# Altium PCB Clock Car.PcbDoc (part 1 of 2)
Units mil, origin at the board's own origin, x right, y up, seen from the top; angles counter-clockwise.
Board outline 1450 x 3300 mil, 4 copper layers (TOP, GND, PWR, BOT), stack 60.556 mil thick; 84 components, 67 nets, 314 pads, 152 vias.
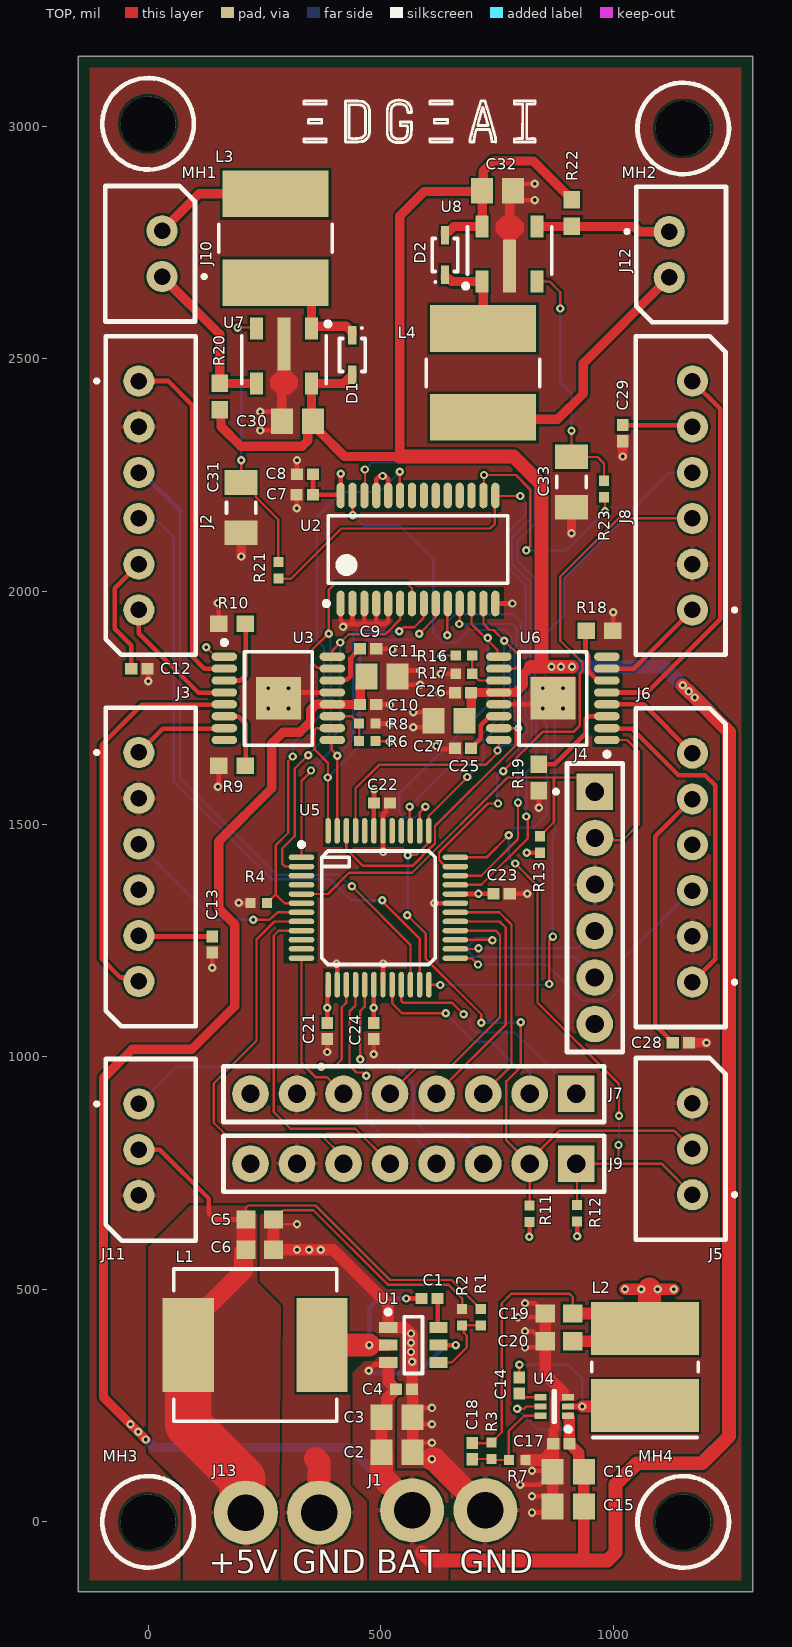
[diagram p0: TOP view]
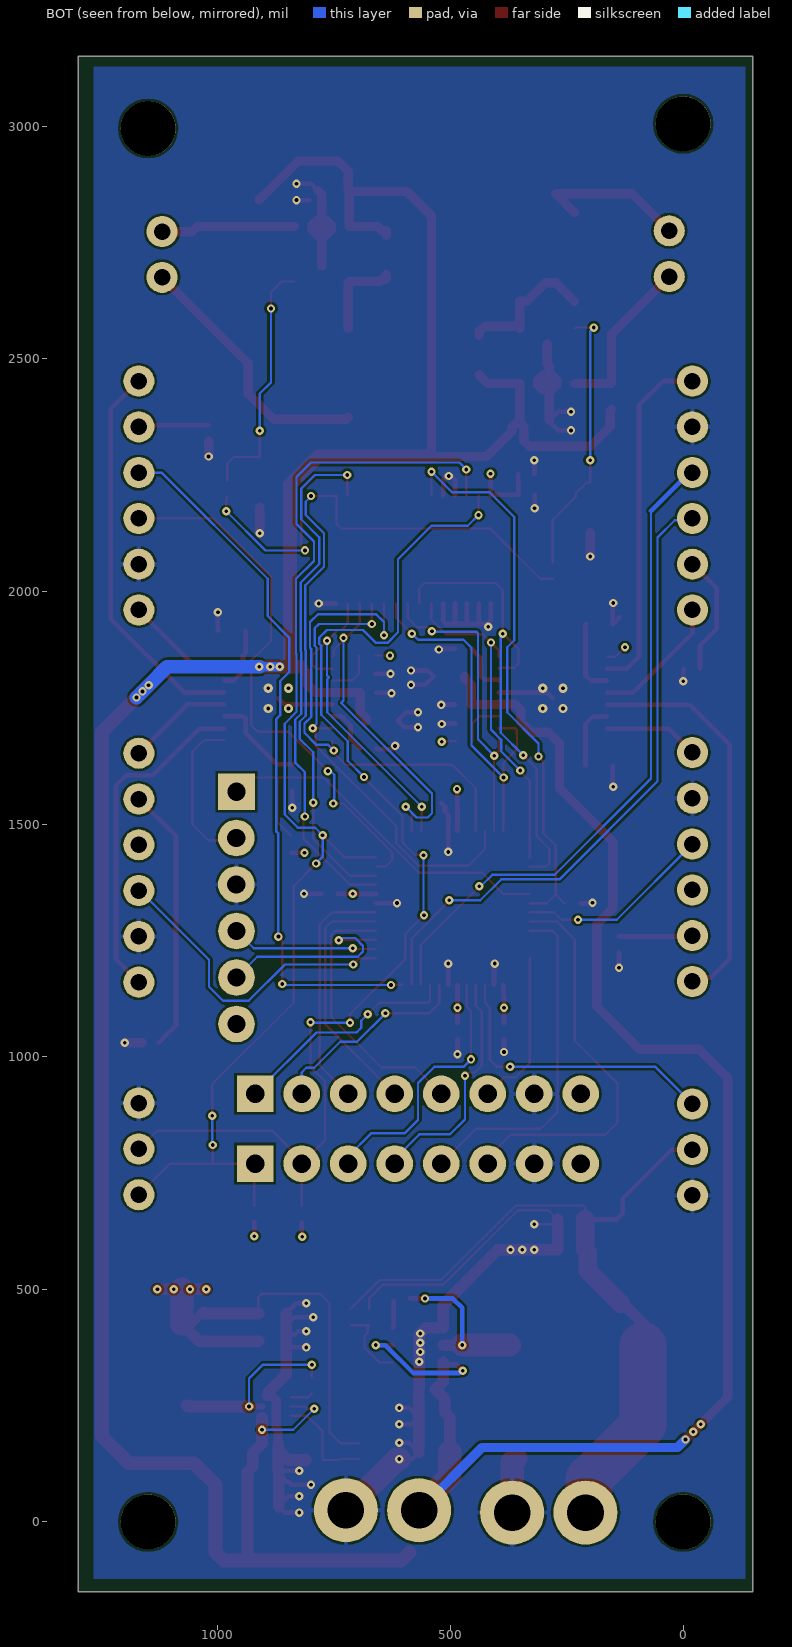
[diagram p1: BOT view, seen from below]
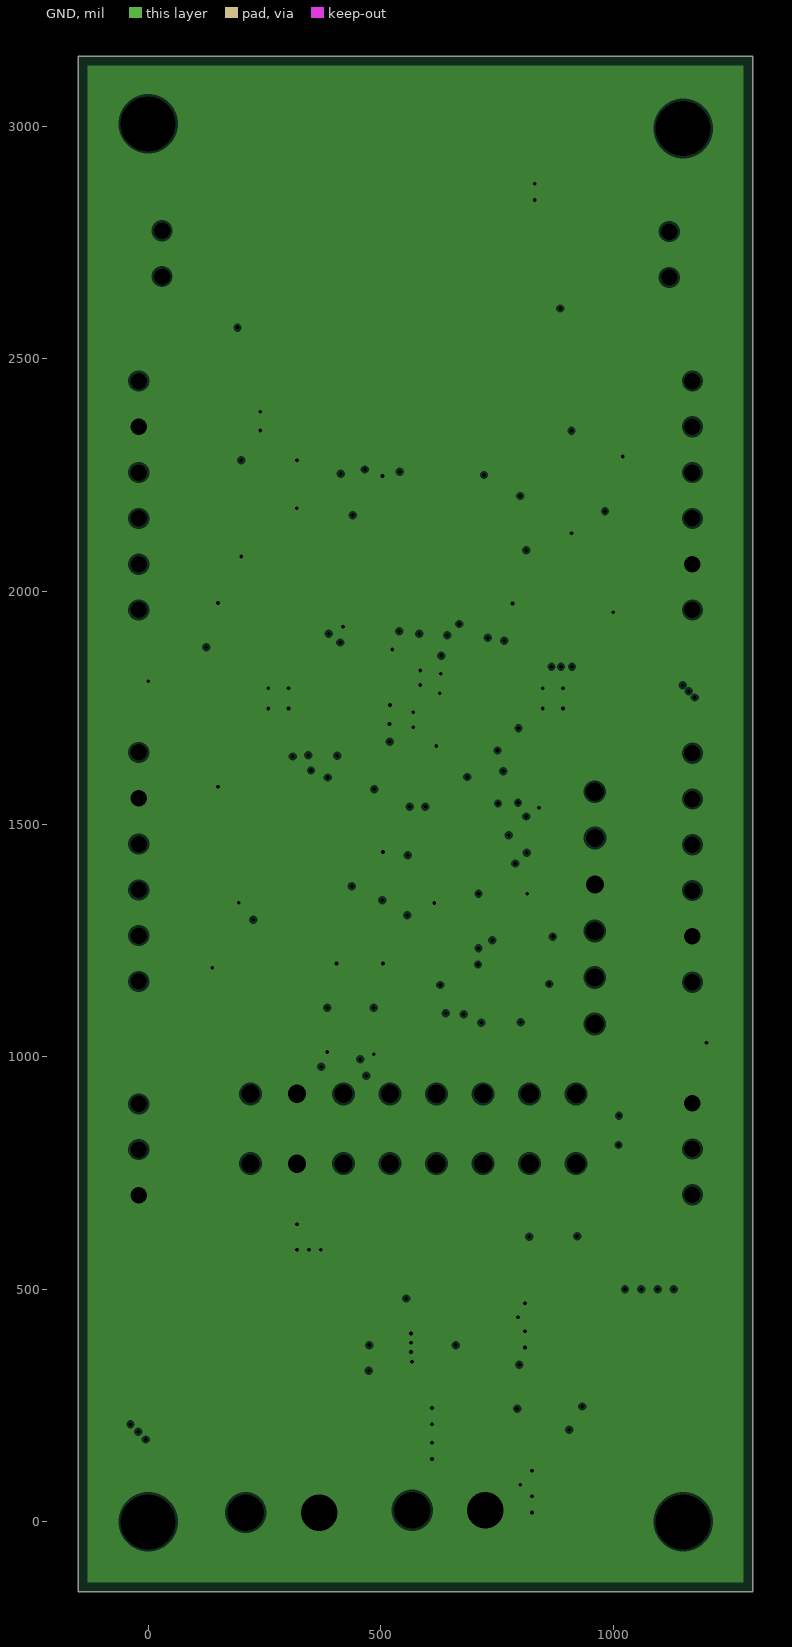
[diagram p2: GND, clearances drawn from the general rule]
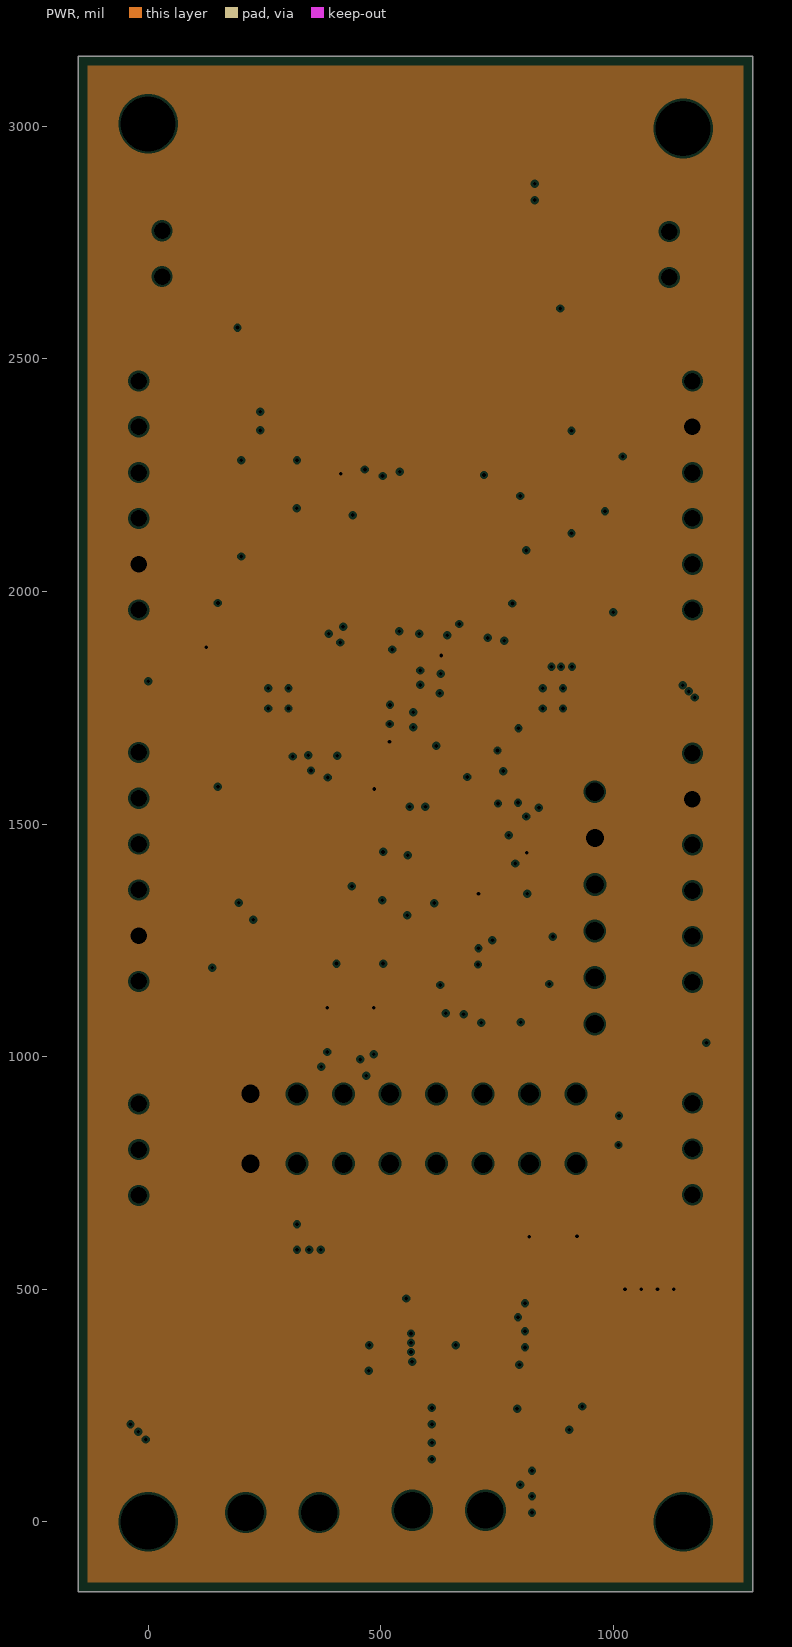
[diagram p3: PWR, clearances drawn from the general rule]

## Layer stack, top to bottom
Top Solder: solder mask 1, SM-001, Dk 4
TOP: signal copper 1.378
Dielectric 2: prepreg 7.5, PP-017, Dk 4.3
GND: plane copper 1.4, net GND
Dielectric 3: core 40, Core-039, Dk 4.8
PWR: plane copper 1.4, net +3V3
Dielectric 4: prepreg 7.5, PP-017, Dk 4.3
BOT: signal copper 1.378
Bottom Solder: solder mask 1, SM-001, Dk 4

## Board outline
-150,-150 1300,-150 1300,3150 -150,3150

## Design rules (kind name [scope] priority, off if disabled: settings)
Clearance [All] p1: gap=5 ignorepadtopadclearanceinfootprint=FALSE
HoleSize [All] p1: absolutevalues=TRUE maxlimit=200 minlimit=1 maxpercent=80.000 minpercent=20.000
MinimumSolderMaskSliver [All] p1: minsoldermaskwidth=5
PlaneClearance [All] p1: clearance=5
PlaneConnect PlaneConnect_1 [All] p1: pad.planeconnectstyle=Relief pad.reliefexpansion=20 pad.reliefentries=4 pad.reliefconductorwidth=10 pad.reliefairgap=10 via.planeconnectstyle=Direct via.reliefexpansion=20 via.reliefentries=4 via.reliefconductorwidth=10 via.reliefairgap=10
PlaneConnect [All] p2: planeconnectstyle=Direct reliefexpansion=20 reliefentries=4 reliefconductorwidth=10 reliefairgap=10
PolygonConnect PolygonConnect_1 [All] p1: thpad.connectstyle=Relief thpad.reliefconductorwidth=10 thpad.reliefentries=4 thpad.polygonreliefangle="90 Angle" thpad.airgapwidth=5 smdpad.connectstyle=Direct smdpad.reliefconductorwidth=10 smdpad.reliefentries=4 smdpad.polygonreliefangle="90 Angle" smdpad.airgapwidth=10 via.connectstyle=Direct via.reliefconductorwidth=10 via.reliefentries=4 via.polygonreliefangle="90 Angle" via.airgapwidth=10
PolygonConnect [All] p2: connectstyle=Direct reliefconductorwidth=10 reliefentries=4 polygonreliefangle="90 Angle" airgapwidth=10
RoutingVias [All] p1: holewidth=8 width=18 viastyle="Through Hole" minholewidth=8 minwidth=18 maxholewidth=8 maxwidth=18
SilkToSilkClearance [All] p1: silktosilkclearance=0
SilkToSolderMaskClearance [IsPad] p1: minsilkscreentomaskgap=5 clearancetoexposedcopper=TRUE
SolderMaskExpansion [All] p1: expansion=4 istentingtop=FALSE
Width [All] p1: maxlimit=100 minlimit=5 preferedwidth=10 minimp=50.000000 maximp=50.000000 favimp=50.000000
24 further rules are at their usual default settings.

## Components (designator, comment, footprint, x,y, rotation, side; value= is the part's Value field where it differs from the comment)
C1 "100nF" C0402 605,480 r180 top
C2 "10uF" C0805 535,150 r180 top
C3 "10uF" C0805 535,225 r180 top
C4 "100nF" C0402 550,285 r180 top
C5 "22uF" C0603 240,650 r180 top
C6 "22uF" C0603 240,585 r180 top
C7 "100nF" C0402 336.68,2208 r0 top
C8 "100nF" C0402 337,2252 r0 top
C9 "2u2" C0402 473,1877 r180 top
C10 "100nF" C0402 473,1757 r180 top
C11 "10uF" C0805 503,1817 r180 top
C12 "100nF" C0402 -19,1834 r180 top
C13 "100nF" C0402 138,1241 r90 top
C14 "100nF" C0402 798,293 r90 top
C15 "10uF" C0805 903,33 r0 top
C16 "10uF" C0805 903,108 r0 top
C17 "100nF" C0402 888,168 r0 top
C18 "20pF" C0402 697,152 r90 top
C19 "22uF" C0603 883,448 r0 top
C20 "22uF" C0603 883,388 r0 top
C21 "100nF" C0402 385,1055 r90 top
C22 "100nF" C0402 502.68,1545 r180 top
C23 "100nF" C0402 760,1350 r180 top
C24 "100nF" C0402 485,1055 r90 top
C25 "2u2" C0402 677,1663 r0 top
C26 "100nF" C0402 677,1782 r0 top
C27 "10uF" C0805 647,1722 r0 top
C28 "100nF" C0402 1145,1030 r180 top
C29 "100nF" C0402 1020,2340 r90 top
C30 "10uF" C0805 321,2366 r0 top
C31 "100uF" C1206 200,2180 r90 top
C32 "10uF" C0805 751,2861 r180 top
C33 "100uF" C1206 910,2235 r90 top
D1 "NSVR0320MW2T1G" SODFL250X100-2N 439,2508 r270 top
D2 "NSVR0320MW2T1G" SODFL250X100-2N 638,2723 r90 top
J1 "PWR" PWR 567.52,25 r0 top
J2 "0022035065" 0022035065 -20,2452.13 r90 top
J3 "0022035065" 0022035065 -20,1653.7 r90 top
J4 "PICKIT" PICKIT 960.39,1570 r0 top
J5 "0099990987" 0099990987 1170,703.15 r270 top
J6 "0022035065" 0022035065 1170,1160 r270 top
J7 "SIP8" SIP8 920,920 r270 top
J8 "0022035065" 0022035065 1170,1960 r270 top
J9 "SIP8" SIP8 920,770 r270 top
J10 "0099990986" 0099990986 30,2676.57 r270 top
J11 "0099990987" 0099990987 -20,898.43 r90 top
J12 "0099990986" 0099990986 1120,2773.43 r90 top
J13 "PWR" PWR 210,20 r0 top
L1 "3u3" INDP8682X40N 230,380 r180 top
L2 "3u3" INDP5858X39N 1068,333 r90 top
L3 "100u" INDP6060X28N 274,2759 r90 top
L4 "100u" INDP6060X28N 720,2469.53 r270 top
MH1 "MH3MM_5MM" MH3MM_5MM 0,3005 r0 top
MH2 "MH3MM_5MM" MH3MM_5MM 1150,2995 r0 top
MH3 "MH3MM_5MM" MH3MM_5MM 0,0 r0 top
MH4 "MH3MM_5MM" MH3MM_5MM 1150,0 r0 top
R1 "54k9" RESC1005X04N 715,440 r90 top
R2 "10k" RESC1005X04N 675,440 r270 top
R3 "30.9k" RESC1005X04N 738,153 r90 top
R4 "10k" RESC1005X04N 238,1330 r0 top
R6 "10k" RESC1005X04N 471,1678 r0 top
R7 "10k" RESC1005X04N 793,133 r180 top
R8 "5.6k" RESC1005X04N 471,1716 r180 top
R9 "0R3" RESC1608X06N 180,1625 r0 top
R10 "0R3" RESC1608X06N 180,1930 r0 top
R11 "10k" RESC1005X04N 820,662 r270 top
R12 "10k" RESC1005X04N 922,663 r270 top
R13 "10k" RESC1005X04N 842,1456 r270 top
R16 "10k" RESC1005X04N 679,1862 r180 top
R17 "5.6k" RESC1005X04N 679,1823 r0 top
R18 "0R3" RESC1608X06N 970,1915 r180 top
R19 "0R3" RESC1608X06N 840,1600 r90 top
R20 "0R3" RESC1608X06N 154,2419 r270 top
R21 "10M" RESC1005X04N 280,2045 r90 top
R22 "0R3" RESC1608X06N 911,2813 r90 top
R23 "10M" RESC1005X04N 980,2220 r90 top
U1 "TPS565208DDCR" SOT95P280X110-6N 570,380 r0 top
U2 "PCA9685PW/Q900,118" TSOP65P640X110-28N 580,2090 r90 top
U3 "DRV8848PWPR" TSOP65P640X120_HS-17N 280,1770 r0 top
U4 "TPS562202DRLR" SOTFL50P160X60-6N 873,248 r180 top
U5 "DSPIC33CK256MP505T-I/PT" CQFP50P900X900X120-48N 495,1320 r0 top
U6 "DRV8848PWPR" TSOP65P640X120_HS-17N 870,1770 r180 top
U7 "AL8861Y-13" SOT89-150P330X160-5N 292,2506 r270 top
U8 "AL8861Y-13" SOT89-150P330X160-5N 777,2725 r90 top

## Footprints (in the part's own frame and the unit in brackets; to place one, negate y for a bottom-side part, rotate by r counter-clockwise, add the part's x,y. Pads: shape width x height; smd on the part's side, far side on the other; paste and mask are expansions set on the pad)
0022035065 [mm]
  round 1.7 hole 0.9: 1(0,0) 2(-2.5,0) 3(-5,0) 4(-7.5,0) 5(-10,0) 6(-12.5,0)
  silkscreen extent -14.95,-3.1 2.45,2.37, body extent -15,-3.07 2.4,1.83, height 5.95
0099990986 [mm]
  round 1.7 hole 0.9: 1(0,0) 2(-2.5,0)
  silkscreen extent -4.95,-3.1 2.45,2.37, body extent -5,-3.07 2.4,1.83, height 5.95
0099990987 [mm]
  round 1.7 hole 0.9: 1(0,0) 2(-2.5,0) 3(-5,0)
  silkscreen extent -7.46,-3.1 2.45,2.37, body extent -7.45,-3.07 2.45,1.83, height 5.95
C0402 [mm] "Chip Capacitor, 2-Leads, Body 1.00x0.50mm, IPC Medium Density"
  rect 0.66x0.62 smd mask+0.071: 1(-0.44,0) 2(0.44,0)
  body extent -0.53,-0.28 0.53,0.27, height 0.55
C0603 [mm] "Chip Capacitor, 2-Leads, Body 1.60x0.80mm, IPC Medium Density"
  rect 1.05x1 smd: 1(-0.75,0) 2(0.75,0)
  body extent -0.88,-0.48 0.87,0.47, height 0.9
C0805 [mm] "Chip Capacitor, 2-Leads, Body 2.00x1.25mm, IPC Medium Density"
  rect 1.2x1.4 smd: 1(-0.85,0) 2(0.85,0)
  body extent -1.05,-0.67 1.05,0.67, height 1.35
C1206 [mm] "Chip Capacitor, 2-Leads, Body 3.20x1.60mm, IPC Medium Density"
  rect 1.35x1.8 smd: 1(-1.375,0) 2(1.375,0)
  silkscreen extent -0.3,-0.8 0.3,0.8, body extent -1.7,-0.9 1.7,0.9, height 1.8
CQFP50P900X900X120-48N [mm] "CQFP, 48-Leads, Body 9.00x9.00mm, Pitch 0.50mm, IPC Medium Density"
  oval 1.4x0.3 smd: 1(-4.2,2.75) 2(-4.2,2.25) 3(-4.2,1.75) 4(-4.2,1.25) 5(-4.2,0.75) 6(-4.2,0.25) 7(-4.2,-0.25) 8(-4.2,-0.75) 9(-4.2,-1.25) 10(-4.2,-1.75) 11(-4.2,-2.25) 12(-4.2,-2.75) 25(4.2,-2.75) 26(4.2,-2.25) 27(4.2,-1.75) 28(4.2,-1.25) 29(4.2,-0.75) 30(4.2,-0.25) 31(4.2,0.25) 32(4.2,0.75) 33(4.2,1.25) 34(4.2,1.75) 35(4.2,2.25) 36(4.2,2.75)
  oval 0.3x1.4 smd: 13(-2.75,-4.2) 14(-2.25,-4.2) 15(-1.75,-4.2) 16(-1.25,-4.2) 17(-0.75,-4.2) 18(-0.25,-4.2) 19(0.25,-4.2) 20(0.75,-4.2) 21(1.25,-4.2) 22(1.75,-4.2) 23(2.25,-4.2) 24(2.75,-4.2) 37(2.75,4.2) 38(2.25,4.2) 39(1.75,4.2) 40(1.25,4.2) 41(0.75,4.2) 42(0.25,4.2) 43(-0.25,4.2) 44(-0.75,4.2) 45(-1.25,4.2) 46(-1.75,4.2) 47(-2.25,4.2) 48(-2.75,4.2)
  silkscreen extent -4.32,-3.1 3.1,3.57, body extent -4.5,-4.5 4.5,4.5, height 1.05
INDP5858X39N [mm] "Precision Wire Wound Inductor, 2-Leads, Body 5.80x5.80mm, IPC Medium Density"
  rect 2.9x5.9 smd: 1(-2.1,0) 2(2.1,0)
  silkscreen extent -3.85,-2.9 0.25,2.9, body extent -3,-2.9 3,2.9, height 4
INDP6060X28N [mm] "Precision Wire Wound Inductor, 2-Leads, Body 6.00x6.00mm, IPC Medium Density"
  rect 2.55x5.8 smd: 1(-2.425,0) 2(2.425,0)
  silkscreen extent -0.75,-3.1 0.75,3.1, body extent -3.1,-3 3.1,3, height 2.9
INDP8682X40N [mm] "Precision Wire Wound Inductor, 2-Leads, Body 8.64x8.18mm, IPC Medium Density"
  rect 2.8x5.15 smd: 1(-3.65,0) 2(3.65,0)
  silkscreen extent -4.45,-4.15 4.45,4.15, body extent -4.42,-4.09 4.42,4.09, height 4.1
MH3MM_5MM [mm]
  round 3 hole 3 unplated: 1(0,0)
  silkscreen extent -2.5,-2.5 2.5,2.5
PICKIT [mm]
  rect 2x2 hole 1: 1(-0.01,-0.017)
  round 2 hole 1: 2(0,-2.54) 3(0,-5.08) 4(-0.01,-7.62) 5(-0.01,-10.16) 6(-0.01,-12.7)
  silkscreen extent -2.22,-14.22 1.52,1.52
PWR [mm]
  round 3.5 hole 2: 1(0,0) 2(4,0)
RESC1005X04N [mm] "Chip Resistor, 2-Leads, Body 1.00x0.50mm, IPC Medium Density"
  rect 0.55x0.55 smd: 1(-0.45,0) 2(0.45,0)
  body extent -0.53,-0.27 0.53,0.28, height 0.4
RESC1608X06N [mm] "Chip Resistor, 2-Leads, Body 1.60x0.80mm, IPC Medium Density"
  rect 0.95x0.9 smd: 1(-0.725,0) 2(0.725,0)
  body extent -0.85,-0.45 0.85,0.45, height 0.55
SIP8 [mm]
  rect 2x2 hole 1: 1(0,0)
  round 2 hole 1: 2(0,-2.54) 3(0,-5.08) 4(0,-7.62) 5(0,-10.16) 6(0,-12.7) 7(0,-15.24) 8(0,-17.78)
  silkscreen extent -1.51,-19.25 1.53,1.54
SODFL250X100-2N [mm] "SODFL, 2-Leads, Body 1.25x2.50mm, IPC Medium Density"
  rect 1x0.45 smd: 1(-1.075,0) 2(1.075,0)
  silkscreen extent -1.52,-0.7 0.9,0.7, body extent -1.25,-0.67 1.25,0.67, height 1
SOT89-150P330X160-5N [mm] "SOT89, 3-Leads, Body 4.50x2.50mm, Pitch 1.50mm, Lead Span 3.3mm, IPC Medium Density"
  rect 1.2x0.7 smd: 1(-1.5,1.5) 3(-1.5,-1.5) 4(1.5,-1.5) 5(1.5,1.5)
  rect 2.9x0.7 smd: 2(-0.65,0)
  TOP region: 0.8,0.35 1.212,0.762 1.688,0.762 2.1,0.35 2.1,-0.35 1.688,-0.762 1.212,-0.762 0.8,-0.35
  silkscreen extent -1.87,-2.3 1.5,2.53, body extent -1.95,-2.3 1.3,2.3, height 1.6
SOT95P280X110-6N [mm] "SOT23, 6-Leads, Body 2.90x2.80mm, Pitch 0.95mm, IPC Medium Density"
  rect 1x0.6 smd: 1(-1.375,0.95) 2(-1.375,0) 3(-1.375,-0.95) 4(1.375,-0.95) 5(1.375,0) 6(1.375,0.95)
  silkscreen extent -1.5,-1.55 0.5,1.92, body extent -1.53,-1.53 1.53,1.53, height 1.1
SOTFL50P160X60-6N [mm] "SOTFL, 6-Leads, Body 1.60x1.60mm, Pitch 0.50mm, IPC Medium Density"
  rect 0.65x0.35 smd: 1(-0.75,0.5) 2(-0.75,0) 3(-0.75,-0.5) 4(0.75,-0.5) 5(0.75,0) 6(0.75,0.5)
  silkscreen extent -0.88,-0.85 0.05,1.35, body extent -0.8,-0.85 0.8,0.85, height 0.6
TSOP65P640X110-28N [mm] "TSOP, 28-Leads, Body 9.70x4.40mm, Pitch 0.65mm, IPC Medium Density"
  oval 1.4x0.45 smd: 1(-2.95,4.225) 2(-2.95,3.575) 3(-2.95,2.925) 4(-2.95,2.275) 5(-2.95,1.625) 6(-2.95,0.975) 7(-2.95,0.325) 8(-2.95,-0.325) 9(-2.95,-0.975) 10(-2.95,-1.625) 11(-2.95,-2.275) 12(-2.95,-2.925) 13(-2.95,-3.575) 14(-2.95,-4.225) 15(2.95,-4.225) 16(2.95,-3.575) 17(2.95,-2.925) 18(2.95,-2.275) 19(2.95,-1.625) 20(2.95,-0.975) 21(2.95,-0.325) 22(2.95,0.325) 23(2.95,0.975) 24(2.95,1.625) 25(2.95,2.275) 26(2.95,2.925) 27(2.95,3.575) 28(2.95,4.225)
  silkscreen extent -3.07,-4.9 1.85,5.12, body extent -3.2,-4.9 3.2,4.9, height 1.1
TSOP65P640X120_HS-17N [mm] "TSOP, 16-Leads, Body 5.00x4.40mm, Pitch 0.65mm, Thermal Pad 2.31x2.46mm, IPC Medium Density"
  oval 1.4x0.45 smd: 1(-2.95,2.275) 2(-2.95,1.625) 3(-2.95,0.975) 4(-2.95,0.325) 5(-2.95,-0.325) 6(-2.95,-0.975) 7(-2.95,-1.625) 8(-2.95,-2.275) 9(2.95,-2.275) 10(2.95,-1.625) 11(2.95,-0.975) 12(2.95,-0.325) 13(2.95,0.325) 14(2.95,0.975) 15(2.95,1.625) 16(2.95,2.275)
  rect 2.46x2.31 smd: 17(0,0)
  silkscreen extent -3.07,-2.55 1.85,3.17, body extent -3.2,-2.55 3.2,2.55, height 1.2

## Part data
C1 C7 C8 C12 C13 C14 C21 C22 C23 C24 C28 C29: library part CL05A104KP5NNNC, "Cap Ceramic 0.1uF 10V X5R 10% SMD 0402 85C Paper T/R", Case Code (Imperial)=0402, Case Code (Metric)=1005, Dielectric=X5R, Manufacturer=Samsung, Max Operating Temperature=85°C, Min Operating Temperature=-55°C, Supplier Part Number 1=1276-1022-1-ND, Tolerance=10%, Voltage Rating=10V, Capacitance=100nF, Case/Package=0402, ComponentLink1Description=https://datasheet.ciiva.com/25709/cl05a104kp5nnnc-25709120.pdf, ComponentLink1URL=https://datasheet.ciiva.com/25709/cl05a104kp5nnnc-25709120.pdf, ComponentLink2Description=https://datasheet.ciiva.com/26838/getdatasheetpartid-358611-26838151.pdf, ComponentLink2URL=https://datasheet.ciiva.com/26838/getdatasheetpartid-358611-26838151.pdf, ComponentLink3Description=https://datasheet.ciiva.com/16437/cl05b104kq5nnnc-16437370.pdf, ComponentLink3URL=https://datasheet.ciiva.com/16437/cl05b104kq5nnnc-16437370.pdf, ComponentLink4Description=https://datasheet.ciiva.com/26309/mlcc-catalogdownload2013-eng-26309007.pdf, ComponentLink4URL=https://datasheet.ciiva.com/26309/mlcc-catalogdownload2013-eng-26309007.pdf, Contact Plating=Tin, Depth=0.5mm, Height=0.5mm, Length=1mm, Manufacturer Part Number=CL05A104KP5NNNC, Mount="Surface Mount", Packaging="Tape and Reel", Part Number=CL05A104KP5NNNC, Pricing 1="1=0.1, 10=0.011, 100=0.0047, 500=0.0033, 1000=0.0026, 2500=0.0024, 5000=0.0022 (USD)", Radiation Hardening=No, Stock 1=2170577, Supplier 1=Digi-Key, Thickness=0.022inch, Voltage Rating (DC)=10V, Width=0.02inch
C2 C3 C11 C15 C16 C27 C30 C32: library part CL21A106KAYNNNG, "Ceramic Capacitor, Multilayer, Ceramic, 25V, 10% +Tol, 10% -Tol, X5R, 15% TC, 10uF, Surface Mount, 0805", Dielectric Material=Ceramic, Manufacturer=Samsung, Supplier Part Number 1=1276-6454-6-ND, Capacitance=10uF, Manufacturer Part Number=CL21A106KAYNNNG, Mount="Surface Mount", Number of Pins=2, Part Number=CL21A106KAYNNNG, Supplier 1=Digi-Key
C4 C10 C17 C26: library part CL05A104KA5NNNC, "Ceramic Capacitor, Multilayer, Ceramic, 25V, 10% +Tol, 10% -Tol, X5R, 15% TC, 0.1uF, Surface Mount, 0402", Manufacturer=Samsung, Supplier Part Number 1=1276-1043-1-ND, Capacitance=100nF, ComponentLink1Description=https://datasheet.ciiva.com:443/pdfs/VipMasterIC/IC/SEMS/SEMS-S-A0008384515/SEMS-S-A0008872913-1.pdf?src-supplier=IHS+Markit, ComponentLink1URL=https://datasheet.ciiva.com:443/pdfs/VipMasterIC/IC/SEMS/SEMS-S-A0008384515/SEMS-S-A0008872913-1.pdf?src-supplier=IHS+Markit, ComponentLink2Description=https://datasheet.ciiva.com/25802/cl05a104ka5nnnc-25802704.pdf?src-supplier=Digi-Key, ComponentLink2URL=https://datasheet.ciiva.com/25802/cl05a104ka5nnnc-25802704.pdf?src-supplier=Digi-Key, ComponentLink3Description=https://datasheet.ciiva.com/16437/cl05a104ka5nnnc-16437369.pdf?src-supplier=Future+Electronics, ComponentLink3URL=https://datasheet.ciiva.com/16437/cl05a104ka5nnnc-16437369.pdf?src-supplier=Future+Electronics, ComponentLink4Description=https://datasheet.ciiva.com/26838/getdatasheetpartid-357412-26838142.pdf?src-supplier=Verical, ComponentLink4URL=https://datasheet.ciiva.com/26838/getdatasheetpartid-357412-26838142.pdf?src-supplier=Verical, ComponentLink5URL=https://datasheet.ciiva.com/26309/mlcc-catalogdownload2013-eng-26309014.pdf?src-supplier=Distrelec, Manufacturer Part Number=CL05A104KA5NNNC, Part Number=CL05A104KA5NNNC, Supplier 1=Digi-Key
C5 C6 C19 C20: library part CL10A226MPMNUBE, "Ceramic Capacitor, Multilayer, Ceramic, 10V, 20% +Tol, 20% -Tol, X5R, 15% TC, 22uF, Surface Mount, 0603", Manufacturer=Samsung, Supplier Part Number 1=1276-6751-2-ND, Capacitance=22uF, Manufacturer Part Number=CL10A226MPMNUBE, Mount="Surface Mount", Part Number=CL10A226MPMNUBE, Supplier 1=Digi-Key
C9 C25: library part JMK105BJ225KV-F, "Ceramic Capacitor, Multilayer, Ceramic, 6.3V, 10% +Tol, 10% -Tol, X5R, 15% TC, 2.2uF, Surface Mount, 0402", Dielectric Material=Ceramic, Manufacturer="Taiyo Yuden", Package Shape=Rectangular, Supplier Part Number 1=587-5867-1-ND, Capacitance=2u2, Manufacturer Part Number=JMK105BJ225KV-F, Mount="Surface Mount", Number of Pins=2, Part Number=JMK105BJ225KV-F, Supplier 1=Digi-Key
C18: library part CC0402JRNPO9BN200, "CAP CER 20PF 50V NPO 0402", Case Code (Imperial)=0402, Case Code (Metric)=1005, Dielectric=C0G, Manufacturer=Yageo, Max Operating Temperature=125°C, Min Operating Temperature=-55°C, Package Quantity=1, Supplier Part Number 1=311-1417-2-ND, Tolerance=5%, Voltage Rating=50V, Capacitance=20pF, Case/Package=0402, ComponentLink1Description=https://datasheet.ciiva.com/7656/1132289-7656614.pdf, ComponentLink1URL=https://datasheet.ciiva.com/7656/1132289-7656614.pdf, ComponentLink2Description=https://datasheet.ciiva.com/176/mlccorderingcode-176360.pdf, ComponentLink2URL=https://datasheet.ciiva.com/176/mlccorderingcode-176360.pdf, ComponentLink3Description=https://datasheet.ciiva.com/176/mlccorderingcode-176361.pdf, ComponentLink3URL=https://datasheet.ciiva.com/176/mlccorderingcode-176361.pdf, ComponentLink4Description=https://datasheet.ciiva.com/5427/upy-gp-np0-16v-to-50v-8-3714-5427769.pdf, ComponentLink4URL=https://datasheet.ciiva.com/5427/upy-gp-np0-16v-to-50v-8-3714-5427769.pdf, Depth=0.5mm, Length=1mm, Manufacturer Part Number=CC0402JRNPO9BN200, Mount="Surface Mount", Packaging="Tape and Reel", Part Number=CC0402JRNPO9BN200, Pricing 1="10000=0.0033 (USD)", Stock 1=0, Supplier 1=Digi-Key, Thickness=0.022inch, Voltage Rating (DC)=50V, Width=0.02inch
C31 C33: library part CL31A107MQHNNNE, "Cap Ceramic 100uF 6.3V X5R 20% SMD 1206 85C T/R", Case Code (Imperial)=1206, Case Code (Metric)=3216, Dielectric=X5R, Manufacturer=Samsung, Max Operating Temperature=85°C, Min Operating Temperature=-55°C, Package Quantity=2000, Supplier Part Number 1=1276-1782-1-ND, Tolerance=20%, Voltage Rating=6.3V, Voltage Rating (DC)=6V3, Capacitance=100uF, Case/Package=1206, ComponentLink1Description=https://datasheet.ciiva.com/20173/71-0886-20173093.pdf, ComponentLink1URL=https://datasheet.ciiva.com/20173/71-0886-20173093.pdf, ComponentLink2Description=https://datasheet.ciiva.com/25723/cl31a107mqhnnne-25723159.pdf, ComponentLink2URL=https://datasheet.ciiva.com/25723/cl31a107mqhnnne-25723159.pdf, ComponentLink3Description=https://datasheet.ciiva.com/16437/cl31a107mqhnnne-16437212.pdf, ComponentLink3URL=https://datasheet.ciiva.com/16437/cl31a107mqhnnne-16437212.pdf, ComponentLink4Description=https://datasheet.ciiva.com/15195/getdatasheetpartid-358449-15195997.pdf, ComponentLink4URL=https://datasheet.ciiva.com/15195/getdatasheetpartid-358449-15195997.pdf, Contact Plating=Tin, Depth=1.6mm, Height=1.6mm, Length=3.2mm, Manufacturer Part Number=CL31A107MQHNNNE, Mount="Surface Mount", Packaging="Tape and Reel", Part Number=CL31A107MQHNNNE, Pricing 1="1=0.56, 10=0.396, 100=0.261, 500=0.1933, 1000=0.1643 (USD)", Radiation Hardening=No, Stock 1=3572, Supplier 1=Digi-Key, Thickness=0.071inch, Width=0.063inch
D1 D2: "Diode Schottky 20V 1A Automotive 2-Pin SOD-323 T/R", Forward Voltage=500mV, Manufacturer="ON Semiconductor", Supplier Part Number 1=NSVR0320MW2T1GOSCT-ND, Height=0.9mm, Lead Free="Lead Free", Length=1.8mm, Manufacturer Part Number=NSVR0320MW2T1G, Packaging="Tape and Reel", Part Number=NSVR0320MW2T1G, Pricing 1="1=0.39, 10=0.29, 100=0.1808, 500=0.1237, 1000=0.0952 (USD)", Stock 1=8989, Supplier 1=Digi-Key, Width=1.35mm
J1 J13: "PWR wire connector", Part Number=PWR
J2 J3 J6 J8: "Board Connector, 6 Contact(s), 1 Row(s), Male, Straight, Solder Terminal", Flammability Rating="UL94 V-0", Manufacturer=Molex, Supplier Part Number 1=23-0022035065-ND, ComponentLink1Description=https://datasheet.ciiva.com:443/pdfs/VipMasterIC/IC/MOLE/MOLE-S-A0006857462/MOLE-S-A0006865314-1.pdf?src-supplier=IHS+Markit, ComponentLink1URL=https://datasheet.ciiva.com:443/pdfs/VipMasterIC/IC/MOLE/MOLE-S-A0006857462/MOLE-S-A0006865314-1.pdf?src-supplier=IHS+Markit, ComponentLink2Description=https://datasheet.ciiva.com/15217/getdatasheetpartid-198343-15217541.pdf?src-supplier=Verical, ComponentLink2URL=https://datasheet.ciiva.com/15217/getdatasheetpartid-198343-15217541.pdf?src-supplier=Verical, Connector Type="BOARD CONNECTOR", Contact Finish - Mating="TIN (160)", Contact Finish - Termination="Tin/Copper (Sn/Cu)", Contact Gender=Male, DIN Conformance=No, Filter Feature=No, IEC Conformance=No, JESD-609 Code=e2, Manufacturer Part Number=0022035065, Mating Information="MULTIPLE MATING PARTS AVAILABLE", MIL Conformance=No, Mixed Contacts=No, Mount=Board, Mounting Style=STRAIGHT, Number of Contacts=6, Number of Rows Loaded=1, Option="General Purpose", Part Number=0022035065, REACH SVHC=Yes, RoHS Compliant=Yes, Supplier 1=Digi-Key, Terminal Pitch=2.5mm, Termination=Solder
J4: "PICKIT 6-pin connection", Part Number=PICKIT
J5 J11: "Board Connector, 3 Contact(s), 1 Row(s), Male, Straight, Solder Terminal", Flammability Rating="UL94 V-0", Manufacturer=Molex, Manufacturer Series=5267, Supplier Part Number 1=WM2889-ND, ComponentLink1Description=https://datasheet.ciiva.com:443/pdfs/VipMasterIC/IC/MOLE/MOLE-S-A0006857462/MOLE-S-A0006860727-1.pdf?src-supplier=IHS+Markit, ComponentLink1URL=https://datasheet.ciiva.com:443/pdfs/VipMasterIC/IC/MOLE/MOLE-S-A0006857462/MOLE-S-A0006860727-1.pdf?src-supplier=IHS+Markit, ComponentLink2Description=https://datasheet.ciiva.com/738/099990989-sd-738043.pdf?src-supplier=Digi-Key, ComponentLink2URL=https://datasheet.ciiva.com/738/099990989-sd-738043.pdf?src-supplier=Digi-Key, Connector Type="BOARD CONNECTOR", Contact Finish - Mating="TIN (160)", Contact Finish - Termination="TIN (160)", Contact Gender=Male, DIN Conformance=No, Filter Feature=No, IEC Conformance=No, JESD-609 Code=e3, Manufacturer Part Number=0099990987, Mating Information="MULTIPLE MATING PARTS AVAILABLE", MIL Conformance=No, Mixed Contacts=No, Mount=Board, Mounting Style=STRAIGHT, Number of Contacts=3, Number of Rows Loaded=1, Option="General Purpose", Part Number=0099990987, REACH SVHC=Yes, RoHS Compliant=Yes, Supplier 1=Digi-Key, Terminal Pitch=2.5mm, Termination=Solder
J7 J9: "8-pin SIP header", Part Number=SIP8
J10 J12: "Board Connector, 2 Contact(s), 1 Row(s), Male, Straight, 0.098 inch Pitch, Solder Terminal, Locking, Receptacle", Contact Resistance=20mR, Dielectric Withstanding Voltage (AC)=1.4kV, Flammability Rating="UL94 V-0", Insulation Resistance=1GR, Manufacturer=Molex, Manufacturer Part Number=99-99-0986, Manufacturer Series=5267, Max Operating Temperature=105°C, Min Operating Temperature=-40°C, Rated Current (Signal)=3A, Supplier Part Number 1=WM4271-ND, Body Breadth=0.193inch, Body Depth=0.232inch, Body Length=0.291inch, Body/Shell Style=RECEPTACLE, ComponentLink1Description=https://datasheet.ciiva.com:443/pdfs/VipMasterIC/IC/MOLE/MOLES56051/MOLES56051-1.pdf?src-supplier=IHS+Markit, ComponentLink1URL=https://datasheet.ciiva.com:443/pdfs/VipMasterIC/IC/MOLE/MOLES56051/MOLES56051-1.pdf?src-supplier=IHS+Markit, ComponentLink2Description=https://datasheet.ciiva.com/738/099990989-sd-738043.pdf?src-supplier=Digi-Key, ComponentLink2URL=https://datasheet.ciiva.com/738/099990989-sd-738043.pdf?src-supplier=Digi-Key, ComponentLink3Description=https://datasheet.ciiva.com/11747/0900766b80dc7cb9-11747620.pdf?src-supplier=RSComponents, ComponentLink3URL=https://datasheet.ciiva.com/11747/0900766b80dc7cb9-11747620.pdf?src-supplier=RSComponents, Connector Type="BOARD CONNECTOR", Contact Finish - Mating="NOT SPECIFIED", Contact Gender=Male, Contact Pattern=RECTANGULAR, Contact Style="RND PIN-SKT", DIN Conformance=No, Durability=30Cycles, Filter Feature=No, IEC Conformance=No, Insulation Material=Nylon, Mating Contact Pitch=0.098inch, Mating Information="MULTIPLE MATING PARTS AVAILABLE", MIL Conformance=No, Mixed Contacts=No, Mount=Board, Mounting Option 1=LOCKING, Mounting Style=STRAIGHT, Number Of Connectors=1, Number of Contacts=2, Number Of PCB Rows=1, Number of Rows Loaded=1, Option="General Purpose", Part Number=0099990986, PCB Contact Pattern=RECTANGULAR, Polarization Key="POLARIZED HOUSING", REACH SVHC=Yes, Reference Standard=UL, Reliability=COMMERCIAL, RoHS Compliant=Yes, Supplier 1=Digi-Key, Terminal Length=0.138inch, Terminal Pitch=2.5mm, Termination=Solder
L1: library part IHLP3232DZER3R3M01, "General Purpose Inductor, 3.3uH, 20%, 1 Element, Composite-Core, SMD, 3232", Case Code (Imperial)=1210, Case Code (Metric)=3225, Current Rating=300mA, Inductance Tolerance=10%, Manufacturer="Vishay Dale", Package Quantity=2000, Supplier Part Number 1=541-1373-1-ND, Case/Package=1210, Component Type=Inductor, ComponentLink1Description=https://datasheet.ciiva.com:443/pdfs/VipMasterIC/IC/VISH/VISH-S-A0008366212/VISH-S-A0008366226-1.pdf?src-supplier=IHS+Markit, ComponentLink1URL=https://datasheet.ciiva.com:443/pdfs/VipMasterIC/IC/VISH/VISH-S-A0008366212/VISH-S-A0008366226-1.pdf?src-supplier=IHS+Markit, ComponentLink2Description=https://datasheet.ciiva.com/8017/1817578-8017317.pdf?src-supplier=Element14, ComponentLink2URL=https://datasheet.ciiva.com/8017/1817578-8017317.pdf?src-supplier=Element14, Composition=Wirewound, DC Current=300mA, Depth=2.7mm, Height=2.2mm, Height - Seated (Max)=0.094inch, Inductance=3u3, Lead Free="Lead Free", Length=0.126inch, Manufacturer Part Number=IHLP3232DZER3R3M01, Max DC Current=300mA, Military Standard=Not, Part Number=IHLP3232DZER3R3M01, Pricing 1="1=0.27, 10=0.241, 25=0.2112, 50=0.1812, 100=0.166, 250=0.1509, 500=0.1419, 1000=0.1087 (USD)", Stock 1=22920, Supplier 1=Digi-Key, Weight=0.000564oz, Width=2.5mm
L2: library part SDR0603-3R3ML, "General Purpose Inductor, 3.3uH, 20%, 1 Element, Ferrite-Core, SMD, 2323", Case Code (Imperial)=1210, Case Code (Metric)=3225, Current Rating=300mA, DC Resistance (DCR)=50mR, Inductance Tolerance=10%, Inductance-Nom (L)=3.3uH, Inductor Application="POWER INDUCTOR", Inductor Type="GENERAL PURPOSE INDUCTOR", Manufacturer=Bourns, Max Operating Temperature=125°C, Min Operating Temperature=-40°C, Package Diameter=5.8mm, Package Length=3.9mm, Package Quantity=2000, Package Style=SMTMeter, Rated Current-Max=2.6A, Self Resonant Frequency=68MHz, Supplier Part Number 1=SDR0603-3R3MLCT-ND, Test Frequency=1kHz, Tolerance=20%, Case/Package=1210, Component Type=Inductor, ComponentLink1Description=https://datasheet.ciiva.com:443/pdfs/VipMasterIC/IC/BOUR/BOUR-S-A0006604580/BOUR-S-A0006604580-1.pdf?src-supplier=IHS+Markit, ComponentLink1URL=https://datasheet.ciiva.com:443/pdfs/VipMasterIC/IC/BOUR/BOUR-S-A0006604580/BOUR-S-A0006604580-1.pdf?src-supplier=IHS+Markit, ComponentLink2Description=https://datasheet.ciiva.com/6697/sdr0603-6697767.pdf?src-supplier=Digi-Key, ComponentLink2URL=https://datasheet.ciiva.com/6697/sdr0603-6697767.pdf?src-supplier=Digi-Key, ComponentLink3Description=https://datasheet.ciiva.com/6697/sdr0603-6697769.pdf?src-supplier=Digi-Key, ComponentLink3URL=https://datasheet.ciiva.com/6697/sdr0603-6697769.pdf?src-supplier=Digi-Key, ComponentLink4Description=https://datasheet.ciiva.com/6697/sdr0603-6697765.pdf?src-supplier=Digi-Key, ComponentLink4URL=https://datasheet.ciiva.com/6697/sdr0603-6697765.pdf?src-supplier=Digi-Key, ComponentLink5Description=https://datasheet.ciiva.com/8517/sdr0603-8517787.pdf?src-supplier=Avnet, ComponentLink5URL=https://datasheet.ciiva.com/8517/sdr0603-8517787.pdf?src-supplier=Avnet, ComponentLink6Description=https://datasheet.ciiva.com/22715/1695377-22715465.pdf?src-supplier=Element14, ComponentLink6URL=https://datasheet.ciiva.com/22715/1695377-22715465.pdf?src-supplier=Element14, ComponentLink7Description=https://datasheet.ciiva.com/17284/sdr0603-17284622.pdf?src-supplier=Avnet+Europe, ComponentLink7URL=https://datasheet.ciiva.com/17284/sdr0603-17284622.pdf?src-supplier=Avnet+Europe, Composition=Wirewound, Construction=Unshielded, Core Material=Ferrite, DC Current=300mA, Depth=2.7mm, Height=2.2mm, Height - Seated (Max)=0.094inch, Inductance=3u3, JESD-609 Code=e1, Lead Free="Lead Free", Length=0.126inch, Manufacturer Part Number=SDR0603-3R3ML, Max DC Current=300mA, Military Standard=Not, Number of Functions=1, Number of Pins=2, Packaging="Tape and Reel", Part Number=SDR0603-3R3ML, Pricing 1="1=0.27, 10=0.241, 25=0.2112, 50=0.1812, 100=0.166, 250=0.1509, 500=0.1419, 1000=0.1087 (USD)", Quality Factor-Min (at L-nom)=21, REACH SVHC=Yes, RoHS Compliant=Yes, Shape/Size Description="CYLINDRICAL PACKAGE", Shielding=Unshielded, Stock 1=22920, Supplier 1=Digi-Key, Surface Mount=Yes, Terminal Finish=Copper, Terminal Placement="Dual Ended", Termination="One Surface", Weight=0.000564oz, Width=2.5mm
L3 L4: library part NRS6028T101MMGJ, "General Purpose Inductor, 100uH, 20%, 1 Element, Ferrite-Core, SMD, 2424", Case Code (Imperial)=1210, Case Code (Metric)=3225, Case/Size Code=2424, Current Rating=300mA, DC Resistance (DCR)=600mR, Inductance Tolerance=10%, Inductance-Nom (L)=100uH, Inductor Application="POWER INDUCTOR", Inductor Type="GENERAL PURPOSE INDUCTOR", Manufacturer="Taiyo Yuden", Max Operating Temperature=120°C, Min Operating Temperature=-25°C, Package Height=2.8mm, Package Length=6mm, Package Quantity=2000, Package Style=SMTMeter, Rated Current-Max=660mA, Self Resonant Frequency=3MHz, Supplier Part Number 1=587-2935-1-ND, Test Frequency=100kHz, Tolerance=20%, Case/Package=1210, Component Type=Inductor, ComponentLink1Description=https://datasheet.ciiva.com:443/pdfs/VipMasterIC/IC/TAIY/TAIY-S-A0009101225/TAIY-S-A0009101284-1.pdf?src-supplier=IHS+Markit, ComponentLink1URL=https://datasheet.ciiva.com:443/pdfs/VipMasterIC/IC/TAIY/TAIY-S-A0009101225/TAIY-S-A0009101284-1.pdf?src-supplier=IHS+Markit, ComponentLink2Description=https://datasheet.ciiva.com/8500/nrs6028t101mmgj-ss-8500496.pdf?src-supplier=Avnet, ComponentLink2URL=https://datasheet.ciiva.com/8500/nrs6028t101mmgj-ss-8500496.pdf?src-supplier=Avnet, ComponentLink3Description=https://datasheet.ciiva.com/25607/0900766b810b3cd2-25607097.pdf?src-supplier=RSComponents, ComponentLink3URL=https://datasheet.ciiva.com/25607/0900766b810b3cd2-25607097.pdf?src-supplier=RSComponents, ComponentLink4Description=https://datasheet.ciiva.com/22796/wound04-e-22796042.pdf?src-supplier=Farnell, ComponentLink4URL=https://datasheet.ciiva.com/22796/wound04-e-22796042.pdf?src-supplier=Farnell, ComponentLink5Description=https://datasheet.ciiva.com/22715/wound04-e-22715257.pdf?src-supplier=Element14, ComponentLink5URL=https://datasheet.ciiva.com/22715/wound04-e-22715257.pdf?src-supplier=Element14, Composition=Wirewound, Construction=Chip, Core Material=Ferrite, DC Current=300mA, Depth=2.7mm, Height=2.2mm, Height - Seated (Max)=0.094inch, Inductance=100u, Lead Free="Lead Free", Length=0.126inch, Manufacturer Part Number=NRS6028T101MMGJ, Max DC Current=300mA, Military Standard=Not, Number of Functions=1, Number of Pins=2, Package Width=6mm, Packaging="Tape and Reel", Part Number=NRS6028T101MMGJ, Pricing 1="1=0.27, 10=0.241, 25=0.2112, 50=0.1812, 100=0.166, 250=0.1509, 500=0.1419, 1000=0.1087 (USD)", REACH SVHC=Yes, RoHS Compliant=Yes, Shape/Size Description="RECTANGULAR PACKAGE", Shielding=Shielded, Stock 1=22920, Supplier 1=Digi-Key, Surface Mount=Yes, Terminal Placement="Dual Ended", Termination="One Surface", Weight=0.000564oz, Width=2.5mm
R1: library part RC0402FR-0754K9L, "Fixed Resistor, Metal Glaze/thick Film, 0.0625W, 54900ohm, 50V, 1% +/-Tol, 100ppm/Cel, Surface Mount, 0402", Manufacturer=Yageo, Max Operating Temperature=155°C, Min Operating Temperature=-55°C, Package Height=0.35mm, Package Length=1mm, Package Shape=Rectangular, Package Style=SMTMeter, Package Width=0.5mm, Rated Power Dissipation (P)=62.5mW, Rated Temperature=70°C, Resistor Type="FIXED RESISTOR", Supplier Part Number 1=YAG3185CT-ND, Temperature Coefficient=100ppm/°C, Tolerance=1%, Working Voltage=50V, Additional Feature="LASER TRIMMABLE", ComponentLink1Description=https://datasheet.ciiva.com:443/pdfs/VipMasterIC/IC/YAGO/YAGO-S-A0008145938/YAGO-S-A0008145938-1.pdf?src-supplier=IHS+Markit, ComponentLink1URL=https://datasheet.ciiva.com:443/pdfs/VipMasterIC/IC/YAGO/YAGO-S-A0008145938/YAGO-S-A0008145938-1.pdf?src-supplier=IHS+Markit, ComponentLink2Description=https://datasheet.ciiva.com/5596/pyu-rc0402-51-rohs-l-6-r-8721-5596014.pdf?src-supplier=Mouser, ComponentLink2URL=https://datasheet.ciiva.com/5596/pyu-rc0402-51-rohs-l-6-r-8721-5596014.pdf?src-supplier=Mouser, ComponentLink3Description=https://datasheet.ciiva.com/17051/pyu-rc0402-51-rohs-l-6-r-17051644.pdf?src-supplier=Future+Electronics, ComponentLink3URL=https://datasheet.ciiva.com/17051/pyu-rc0402-51-rohs-l-6-r-17051644.pdf?src-supplier=Future+Electronics, ComponentLink4Description=https://datasheet.ciiva.com/16868/pyu-rc0402-51-rohs-l-6-16868007.pdf?src-supplier=Avnet+Europe, ComponentLink4URL=https://datasheet.ciiva.com/16868/pyu-rc0402-51-rohs-l-6-16868007.pdf?src-supplier=Avnet+Europe, ComponentLink5Description=https://datasheet.ciiva.com/28398/pyu-rc0402-51-rohs-l-6-28398586.pdf?src-supplier=Avnet+Europe, ComponentLink5URL=https://datasheet.ciiva.com/28398/pyu-rc0402-51-rohs-l-6-28398586.pdf?src-supplier=Avnet+Europe, ComponentLink6Description=https://datasheet.ciiva.com:443/pdfs/VipMasterIC/IC/YAGO/YAGO-S-A0003597364/YAGO-S-A0003597364-1.pdf?src-supplier=IHS+Markit, ComponentLink6URL=https://datasheet.ciiva.com:443/pdfs/VipMasterIC/IC/YAGO/YAGO-S-A0003597364/YAGO-S-A0003597364-1.pdf?src-supplier=IHS+Markit, ComponentLink7Description=https://datasheet.ciiva.com/12576/pyu-ac-51-rohs-l-2-12576619.pdf?src-supplier=Mouser, ComponentLink7URL=https://datasheet.ciiva.com/12576/pyu-ac-51-rohs-l-2-12576619.pdf?src-supplier=Mouser, Construction=Chip, JESD-609 Code=e3, Manufacturer Part Number=RC0402FR-0754K9L, Mount="Surface Mount", Number of Pins=2, Packaging="Tape and Reel", Part Number=RC0402FR-0754K9L, REACH SVHC=Yes, Reference Standard=AEC-Q200, Resistance=54k9, RoHS Compliant=Yes, Size Code=0402, Supplier 1=Digi-Key, Technology="METAL GLAZE/THICK FILM", Terminal Finish=Nickel, Termination=Wraparound
R2 R4 R6 R7 R11 R12 R13 R16: library part RC0402FR-0710KL, "RES SMD 10K OHM 1% 1/16W 0402", Case Code (Imperial)=0402, Case Code (Metric)=1005, Manufacturer=Yageo, Max Operating Temperature=155°C, Min Operating Temperature=-55°C, Power Rating=62.5mW, Supplier Part Number 1=311-10.0KLRCT-ND, Temperature Coefficient=100ppm/°C, Tolerance=1%, Voltage Rating=50V, Case/Package=0402, ComponentLink1Description=https://datasheet.ciiva.com/7660/38568-7660787.pdf, ComponentLink1URL=https://datasheet.ciiva.com/7660/38568-7660787.pdf, ComponentLink2Description=https://datasheet.ciiva.com/7849/1784430-7849813.pdf, ComponentLink2URL=https://datasheet.ciiva.com/7849/1784430-7849813.pdf, ComponentLink3Description=https://datasheet.ciiva.com/11808/0900766b80c66297-11808309.pdf, ComponentLink3URL=https://datasheet.ciiva.com/11808/0900766b80c66297-11808309.pdf, ComponentLink4Description=https://datasheet.ciiva.com/16744/pyu-rc0402-51-rohs-l-6-r-16744005.pdf, ComponentLink4URL=https://datasheet.ciiva.com/16744/pyu-rc0402-51-rohs-l-6-r-16744005.pdf, ComponentLink5Description=https://datasheet.ciiva.com/7849/1686128-7849814.pdf, ComponentLink5URL=https://datasheet.ciiva.com/7849/1686128-7849814.pdf, ComponentLink6Description=https://datasheet.ciiva.com/7849/1784430-7849815.pdf, ComponentLink6URL=https://datasheet.ciiva.com/7849/1784430-7849815.pdf, ComponentLink7Description=https://datasheet.ciiva.com/22747/1018594-22747512.pdf, ComponentLink7URL=https://datasheet.ciiva.com/22747/1018594-22747512.pdf, ComponentLink8Description=https://datasheet.ciiva.com/12667/pyu-rc0402-51-rohs-l-6-r-12667067.pdf, ComponentLink8URL=https://datasheet.ciiva.com/12667/pyu-rc0402-51-rohs-l-6-r-12667067.pdf, ComponentLink9Description=https://datasheet.ciiva.com/7983/1018594-7983486.pdf, ComponentLink9URL=https://datasheet.ciiva.com/7983/1018594-7983486.pdf, Composition="Thick Film", Depth=0.5mm, Height=0.32mm, Lead Free="Lead Free", Lead Pitch=0.2mm, Length=1mm, Manufacturer Part Number=RC0402FR-0710KL, Military Standard=Not, Packaging="Tape and Reel", Part Number=RC0402FR-0710KL, Pricing 1="1=0.1, 10=0.014, 100=0.0056, 1000=0.0025, 2500=0.0022, 5000=0.0018 (USD)", REACH SVHC="No SVHC", Resistance=10k, Stock 1=14034353, Supplier 1=Digi-Key, Width=0.5mm
R3: library part RC0402FR-0730K9L, "Fixed Resistor, Metal Glaze/thick Film, 0.0625W, 30900ohm, 50V, 1% +/-Tol, 100ppm/Cel, Surface Mount, 0402", Manufacturer=Yageo, Max Operating Temperature=155°C, Min Operating Temperature=-55°C, Package Height=0.35mm, Package Length=1mm, Package Shape=Rectangular, Package Style=SMTMeter, Package Width=0.5mm, Rated Power Dissipation (P)=62.5mW, Rated Temperature=70°C, Resistor Type="FIXED RESISTOR", Supplier Part Number 1=YAG3110CT-ND, Temperature Coefficient=100ppm/°C, Tolerance=1%, Working Voltage=50V, Additional Feature="LASER TRIMMABLE", ComponentLink1Description=https://datasheet.ciiva.com:443/pdfs/VipMasterIC/IC/YAGO/YAGO-S-A0008145938/YAGO-S-A0008145938-1.pdf?src-supplier=IHS+Markit, ComponentLink1URL=https://datasheet.ciiva.com:443/pdfs/VipMasterIC/IC/YAGO/YAGO-S-A0008145938/YAGO-S-A0008145938-1.pdf?src-supplier=IHS+Markit, ComponentLink2Description=https://datasheet.ciiva.com/17358/pyu-rc0402-51-rohs-l-6-r-17358396.pdf?src-supplier=Future+Electronics, ComponentLink2URL=https://datasheet.ciiva.com/17358/pyu-rc0402-51-rohs-l-6-r-17358396.pdf?src-supplier=Future+Electronics, ComponentLink3Description=https://datasheet.ciiva.com/12577/pyu-rc0402-51-rohs-l-6-r-12577735.pdf?src-supplier=Mouser, ComponentLink3URL=https://datasheet.ciiva.com/12577/pyu-rc0402-51-rohs-l-6-r-12577735.pdf?src-supplier=Mouser, ComponentLink4Description=https://datasheet.ciiva.com/16868/pyu-rc0402-51-rohs-l-6-16868476.pdf?src-supplier=Avnet+Europe, ComponentLink4URL=https://datasheet.ciiva.com/16868/pyu-rc0402-51-rohs-l-6-16868476.pdf?src-supplier=Avnet+Europe, ComponentLink5Description=https://datasheet.ciiva.com/28401/pyu-rc0402-51-rohs-l-6-28401157.pdf?src-supplier=Avnet+Europe, ComponentLink5URL=https://datasheet.ciiva.com/28401/pyu-rc0402-51-rohs-l-6-28401157.pdf?src-supplier=Avnet+Europe, Construction=Chip, JESD-609 Code=e3, Manufacturer Part Number=RC0402FR-0730K9L, Mount="Surface Mount", Number of Pins=2, Packaging="Tape and Reel", Part Number=RC0402FR-0730K9L, REACH SVHC=Yes, Resistance=30.9k, RoHS Compliant=Yes, Size Code=0402, Supplier 1=Digi-Key, Technology="METAL GLAZE/THICK FILM", Terminal Finish=Nickel, Termination=Wraparound
R8 R17: library part RC0402FR-075K6L, "YAGEO (PHYCOMP)         RC0402FR-075K6L             SMD Chip Resistor, Thick Film, 5.6 kohm, 50 V, 0402 [1005 Metric], 63 mW,  1%, RC Series", Case Code (Imperial)=0402, Case Code (Metric)=1005, Manufacturer=Yageo, Max Operating Temperature=155°C, Min Operating Temperature=-55°C, Power Rating=62.5mW, Supplier Part Number 1=311-5.6KLRTR-ND, Temperature Coefficient=100ppm/°C, Tolerance=1%, Voltage Rating=50V, Case/Package=0402, ComponentLink1Description=https://datasheet.ciiva.com/12667/pyu-rc0402-51-rohs-l-6-r-12667035.pdf, ComponentLink1URL=https://datasheet.ciiva.com/12667/pyu-rc0402-51-rohs-l-6-r-12667035.pdf, Composition="Thick Film", Depth=0.5mm, Lead Free="Lead Free", Length=1mm, Manufacturer Part Number=RC0402FR-075K6L, Military Standard=Not, Packaging="Tape and Reel", Part Number=RC0402FR-075K6L, Pricing 1="10000=0.00158, 30000=0.00138, 50000=0.00127, 100000=0.00124 (USD)", REACH SVHC=Unknown, Resistance=5.6k, Stock 1=1140000, Supplier 1=Digi-Key, Termination=SMD/SMT
R9 R10 R18 R19 R20 R22: library part RLP73N1JR30JTD, "Fixed Resistor, Metal Glaze/thick Film, 0.125W, 0.3ohm, 5% +/-Tol, 300ppm/Cel, 0603", Manufacturer="TE Connectivity", Supplier Part Number 1=A109769CT-ND, ComponentLink1Description=https://www.te.com:443/usa-en/product-1-2176052-9.datasheet.pdf?src-supplier=IHS+Markit, ComponentLink1URL=https://www.te.com:443/usa-en/product-1-2176052-9.datasheet.pdf?src-supplier=IHS+Markit, ComponentLink2Description=https://datasheet.ciiva.com/18600/eng-cd-2176052-ba-18600346.pdf?src-supplier=Digi-Key, ComponentLink2URL=https://datasheet.ciiva.com/18600/eng-cd-2176052-ba-18600346.pdf?src-supplier=Digi-Key, ComponentLink3Description=https://datasheet.ciiva.com/18600/eng-cd-2176052-ba-18600347.pdf?src-supplier=Digi-Key, ComponentLink3URL=https://datasheet.ciiva.com/18600/eng-cd-2176052-ba-18600347.pdf?src-supplier=Digi-Key, ComponentLink4Description=https://datasheet.ciiva.com/18600/eng-cd-2176052-ba-18600348.pdf?src-supplier=Digi-Key, ComponentLink4URL=https://datasheet.ciiva.com/18600/eng-cd-2176052-ba-18600348.pdf?src-supplier=Digi-Key, Manufacturer Part Number=RLP73N1JR30JTD, Part Number=RLP73N1JR30JTD, Resistance=0R3, Supplier 1=Digi-Key
R21 R23: library part AC0402JR-0710ML, "Fixed Resistor, Metal Glaze/thick Film, 0.0625W, 10000000ohm, 50V, 5% +/-Tol, 100ppm/Cel, Surface Mount, 0402", Manufacturer=Yageo, Max Operating Temperature=155°C, Min Operating Temperature=-55°C, Package Height=0.32mm, Package Length=1mm, Package Shape=Rectangular, Package Style=SMTMeter, Package Width=0.5mm, Rated Power Dissipation (P)=62.5mW, Rated Temperature=70°C, Resistor Type="FIXED RESISTOR", Supplier Part Number 1=YAG3518CT-ND, Temperature Coefficient=100ppm/°C, Tolerance=5%, Working Voltage=50V, Additional Feature="LASER TRIMMABLE", ComponentLink1Description=https://datasheet.ciiva.com:443/pdfs/VipMasterIC/IC/YAGO/YAGO-S-A0003597364/YAGO-S-A0003597364-1.pdf?src-supplier=IHS+Markit, ComponentLink1URL=https://datasheet.ciiva.com:443/pdfs/VipMasterIC/IC/YAGO/YAGO-S-A0003597364/YAGO-S-A0003597364-1.pdf?src-supplier=IHS+Markit, ComponentLink2Description=https://datasheet.ciiva.com/12576/pyu-ac-51-rohs-l-2-12576619.pdf?src-supplier=Mouser, ComponentLink2URL=https://datasheet.ciiva.com/12576/pyu-ac-51-rohs-l-2-12576619.pdf?src-supplier=Mouser, Construction=Chip, JESD-609 Code=e3, Manufacturer Part Number=AC0402JR-0710ML, Mount="Surface Mount", Number of Pins=2, Packaging="Tape and Reel", Part Number=AC0402JR-0710ML, REACH SVHC=Yes, Reference Standard=AEC-Q200, Resistance=10M, RoHS Compliant=Yes, Size Code=0402, Supplier 1=Digi-Key, Technology="METAL GLAZE/THICK FILM", Terminal Finish=Nickel, Termination=Wraparound
U1: "Switching Regulator, Current-mode, 8A, 500kHz Switching Freq-Max, PDSO6", Manufacturer="Texas Instruments", Manufacturer Part Number=TPS565208DDCR, Part Number=TPS565208DDCR, Supplier 1="Arrow Electronics", Supplier Part Number 1=TPS565208DDCR
U2: "LED Driver, 16-Segment, PDSO28", Manufacturer="NXP Semiconductors", Package Code=TSSOP, Supplier Part Number 1=568-5931-1-ND, Manufacturer Part Number=PCA9685PW/Q900,118, Number of Pins=28, Part Number=PCA9685PW/Q900,118, Supplier 1=Digi-Key
U3 U6: "Brush DC Motor Controller, 2A, PDSO16", Manufacturer="Texas Instruments", Supplier Part Number 1=296-47770-1-ND, Manufacturer Part Number=DRV8848PWPR, Part Number=DRV8848PWPR, Supplier 1=Digi-Key
U4: "Switching Regulator, 2A", Manufacturer="Texas Instruments", Manufacturer Part Number=TPS562202DRLR, Part Number=TPS562202DRLR, Supplier 1="Arrow Electronics", Supplier Part Number 1=TPS562202DRLR
U5: "16-Bit Size, 0-Ext Bit, 64MHz, CMOS, PQFP48", Manufacturer=Microchip, Supplier Part Number 1=DSPIC33CK256MP505T-I/PTCT-ND, ComponentLink1URL=https://datasheet.ciiva.com:443/pdfs/VipMasterIC/IC/MCHP/MCHP-S-A0007771634/MCHP-S-A0007771634-1.pdf?src-supplier=IHS+Markit, Manufacturer Part Number=DSPIC33CK256MP505T-I/PT, Part Number=DSPIC33CK256MP505T-I/PT, Supplier 1=Digi-Key
U7 U8: "LED Driver", Manufacturer=Diodes, Manufacturer Part Number=AL8861WT-7, Supplier Part Number 1=AL8861WT-7DICT-ND, Desc="LED Driver", Part Number=AL8861Y-13, Supplier 1=Digi-Key
MH1 MH2 MH3 MH4: Part Number=MH3MM_5MM

## Via types
v1: diameter 18/18 (per signal layer), hole 8, TOP to BOT, tented top, 88 vias
v2: diameter 18, hole 8, TOP to BOT, tented top, 56 vias
v3: diameter 19.68, hole 7.87, TOP to BOT, 8 vias

## Nets (pads, with @x,y where several pads share a name; then routed paths per layer and width w, separated by ;. In a path a pad name is that pad's centre, name@x,y a point inside that pad or via, vN(x,y) a via of type N, cw(c..) or ccw(c..) an arc to the next point about the centre after c; other vN are vias at no path point)
+3V3: C7.2 C8.2 C12.2 C13.2 C18.2 C19.2 C20.2 C21.2 C22.2 C23.2 C24.2 C28.2 C29.2 J2.5 J3.5 J4.2 J6.5 J7.8 J8.5 J9.8 L2.2 R3.2 R6.2 R11.2 R12.2 R13.2 R16.2 U2.28 U3.1 U5.13 U5.18 U5.32 U5.43 U6.1 | length 3264.9
  TOP w5: v1(125,1880) 145.43,1859.57 U3.1 ; R6.2 518,1678 v2(519,1677) ; v2(630,1862) R16.2 ; C18.2 736.61,169.32 R3.2 760,192.72 760,470 780,490 906,490 913,483 913,448.47 C19.2 ; J4.2 965.39,1465 1020,1465 1055,1500 1055,1655 1029.57,1680.43 U6.1
  TOP w10: C12.2 -36.32,1884.32 -72,1920 -72,2006.43 J2.5 ; J3.5 -18.32,1258.32 C13.2 ; C8.2 354.32,2208.32 C7.2 411.8,2208 U2.28 413.66,2252.66 v1(414,2253) ; C21.2 v2(385,1105) 385,1130.77 386.73,1132.5 U5.13 ; C24.2 v2(485,1105) 485.16,1105.16 U5.18 ; U5.43 485.16,1544.8 C22.2 485.35,1574.35 v1(486,1575) ; U5.32 709.53,1349.53 v2(710,1350) C23.2 ; v1(814,1438) 814.28,1438.28 R13.2 ; v1(819,613) 820,614 R11.2 ; v1(922,614) R12.2 ; C29.2 1166.38,2357.32 J8.5 ; C28.2 1126.89,1030 1119.68,1037.2 1119.68,1037.99 1090,1067.68 1090,1473.7 J6.5
  TOP w20: L2.2@1029.95,452.81 1034.76,448 1067.09,415.68 L2.2
  TOP w25: C20.2 1040.32,388 L2.2 ; C19.2 L2.2@1034.76,448 ; v2(1025,500) v2(1060,500) 1077.5,500 v2(1095,500) v2(1130,500) ; L2.2@1067.09,415.68 L2.2@1077.5,426.09
  TOP w50: L2.2@1077.5,426.09 1077.5,500
+5V: C5.2 C6.2 J11.2 J13.1 L1.2 R1.2 | length 1670.9
  TOP w5: C5.2 210.47,675.47 215,680 360,680 520,520 652.72,520 R1.2
  TOP w10: J11.2 25,800 130,695 130,663 143,650 C5.2
  TOP w25: L1.2 86.3,426.26 128.92,468.88 L1.2@133.88,468.88 ; C6.2@205,579.53 C6.2
  TOP w40: L1.2@133.88,468.88 205,540 C6.2@205,579.53 ; C6.2 C5.2
  TOP w100: L1.2 86.3,208.7 202.77,92.23 202.77,27.23 J13.1
+BATT: C2.2 C3.2 C4.2 C10.2 C11.2 C15.2 C16.2 C17.2 C26.2 C27.2 C30.2 C32.2 D1.2 D2.2 J1.1 R20.2 R22.2 U1.3 U1.5 U3.12 U4.1 U4.5 U6.12 U7.5 U8.5 | length 9667.4
  TOP w5: v1(793,243) 808,243 813,248 U4.5
  TOP w10: U3.12 396.8,1757.2 U3.12@397,1757 ; v1(474,325) 487.38,338.38 511.65,338.38 U1.3 ; U1.5 v1(661,380)
  TOP w20: v2(-5,177) v2(-21.5,193.5) v1(-38,210) -96,268 -96,954 -34,1016 94,1016 186,1108 186,1284 151.5,1318.5 151.5,1462.5 266,1577 266,1673 290,1697 326,1697 349,1720 349,1745 361.2,1757.2 U3.12 ; R20.2 156.69,2387.76 156.69,2354.31 199,2312 331,2312 342.93,2323.93 342.93,2354.46 C30.2 ; U3.12@397,1757 C10.2 455.68,1799.2 469.54,1813.06 C11.2 ; D1.2 420.27,2446.94 U7.5 351.06,2369.41 C30.2 ; D2.2 638,2773.87 639.14,2775.01 647.69,2775.01 656.73,2784.06 U8.5 717.94,2857.52 716,2859.46 593.46,2859.46 541,2807 541,2290 422,2290 368.09,2343.91 368.09,2352.38 C30.2 ; C27.2 680.46,1725.94 694.32,1739.8 C26.2 695.12,1782.8 U6.12 790.8,1782.8 806.57,1798.57 806.57,1821.69 822.89,1838 ; C32.2 720,2863.46 720,2903 742,2925 827.54,2925 902.3,2850.24 903.28,2850.24 911,2842.53 R22.2 ; 875,-80 878,-83
  TOP w25: C2.2 C3.2 512.66,236.12 512.66,264.98 531.89,284.21 531.89,284.41 C4.2@532.48,285 ; U1.3 515.87,301.81 532.18,285.49 532.18,285.3 C4.2@532.48,285 ; C4.2 C4.2@532.48,285 ; U4.1@905.32,223.61 v1(905.32,198) C17.2 905.52,168 905.82,167.7 905.82,167.51 925.34,147.98 925.34,119.12 C16.2 C15.2 936.46,-71.46
  TOP w30: 541,2290 785,2290 845.5,2229.5 845.5,1838.56 844.94,1838 ; J1.1 J1.1@588.15,4.37 ; 588.15,-65.43 605.72,-83 878,-83 987.43,-83 1005,-65.43 1005,80 1051,126 1191,126 1249,184 1249,1698 v1(1175,1772) v2(1162,1785) v2(1149,1798) ; 822.89,1838 844.94,1838 ; v2(911,1838) v2(887.5,1838) v1(867,1838) 844.94,1838
  TOP w50: C2.2 501.54,98.19 567.52,32.2 J1.1
  BOT w5: v1(793,243) 838,198 v1(905.32,198)
  BOT w10: v1(474,325) 476.16,325 481.16,320 580,320 640,380 v1(661,380)
  BOT w20: v2(-5,177) 12,160 432.52,160 J1.1 ; v1(867,1838) v2(887.5,1838) v2(911,1838)
  BOT w30: v2(911,1838) 1109,1838 v2(1149,1798) v2(1162,1785) v1(1175,1772)
A+: J2.1 U3.2 | length 756.2
  TOP w10: J2.1 42.87,2452.13 95,2400 95,1860 121.02,1833.98 U3.2
A-: J2.6 U3.4 | length 287.4
  TOP w10: J2.6 -20,1910 108.23,1781.77 162.83,1781.77 U3.4
A_CCW: U2.7 U3.15 U5.2 | length 1024.1
  TOP w5: U5.2 294.42,1408.58 288,1415 288,1447 315,1474 315,1619 v1(344,1648) ; v1@387.5,1909.5 354,1876 354,1845 363,1836 394.12,1836 U3.15 ; v1@388,1910 388,2003 403,2018 556,2018 567.2,2006.8 U2.7
  BOT w5: v1(344,1648) 392,1696 392,1905 v1(388,1909)
A_CW: U2.6 U3.16 U5.1 | length 719.9
  TOP w5: U5.1 329.65,1592.65 352,1615 v1(350,1615) ; U3.16 396.14,1873.14 v1(413,1890) 431,1908 510,1908 541.61,1939.61 U2.6
  BOT w5: v1(350,1615) 391,1656 391,1680.86 413,1702.86 v1(413,1890)
A_ENC_A: J2.3 U5.22 | length 1426.7
  TOP w5: v1(438,1366) 563.9,1240.1 U5.22
  BOT w5: 69,2173 69,1598 276,1391 410,1391 435,1366 v1(438,1366)
  BOT w10: J2.3 -13.28,2255.28 69,2173
A_ENC_B: J2.4 U5.23 | length 1384.7
  TOP w5: v1(503,1336) 503,1334.67 583.58,1254.08 U5.23
  BOT w5: J2.4 -16.11,2152.96 18.04,2152.96 55,2116 55,1592 266,1381 391,1381 436,1336 v1(503,1336)
B+: J3.1 U3.7 | length 205.5
  TOP w10: J3.1 16.3,1690 31.3,1705 162.83,1705 U3.7
B-: J3.6 U3.5 | length 860
  TOP w10: J3.6 -28.48,1170.06 -60.06,1170.06 -100,1210 -100,1670 -13.82,1756.18 162.83,1756.18 U3.5
B_CCW: U2.9 U3.10 U5.48 | length 797.3
  TOP w5: U5.48 386.73,1631.27 357,1661 357,1692 358,1693 358,1703.09 360.93,1706.02 U3.10 ; v1(583,1909) 617.2,1943.2 617.2,1972.68 U2.9
  BOT w5: v1(386,1600) 455,1669 455,1879 472,1896 570,1896 v1(583,1909)
B_CW: U2.8 U3.9 U5.47 | length 673.3
  TOP w5: U3.9 395,1679.29 395,1658.89 406.32,1647.57 v1(406.32,1646.87) ; U5.47 v1@406.42,1646.58 ; v1(540,1914) 549,1923 572,1923 591.91,1942.91 591.91,1972.97 U2.8
  BOT w5: v1(406.32,1646.87) 406.32,1647.32 441,1682 441,1910.07 443.93,1913 539,1913 v1(540,1914)
B_ENC_A: J3.3 U5.7 | length 423.8